# Altium PCB MIN_MOW_Moway_V3 Panel.PcbDoc
Units mm, origin at the board's own origin, x right, y up, seen from the top; angles counter-clockwise.
Board outline 199.54 x 125.53 mm, 4 copper layers (Top Layer, Mid-Layer 1, Mid-Layer 2, Bottom Layer), stack 1 mm thick; 78 components, 0 nets, 326 pads, 0 vias.
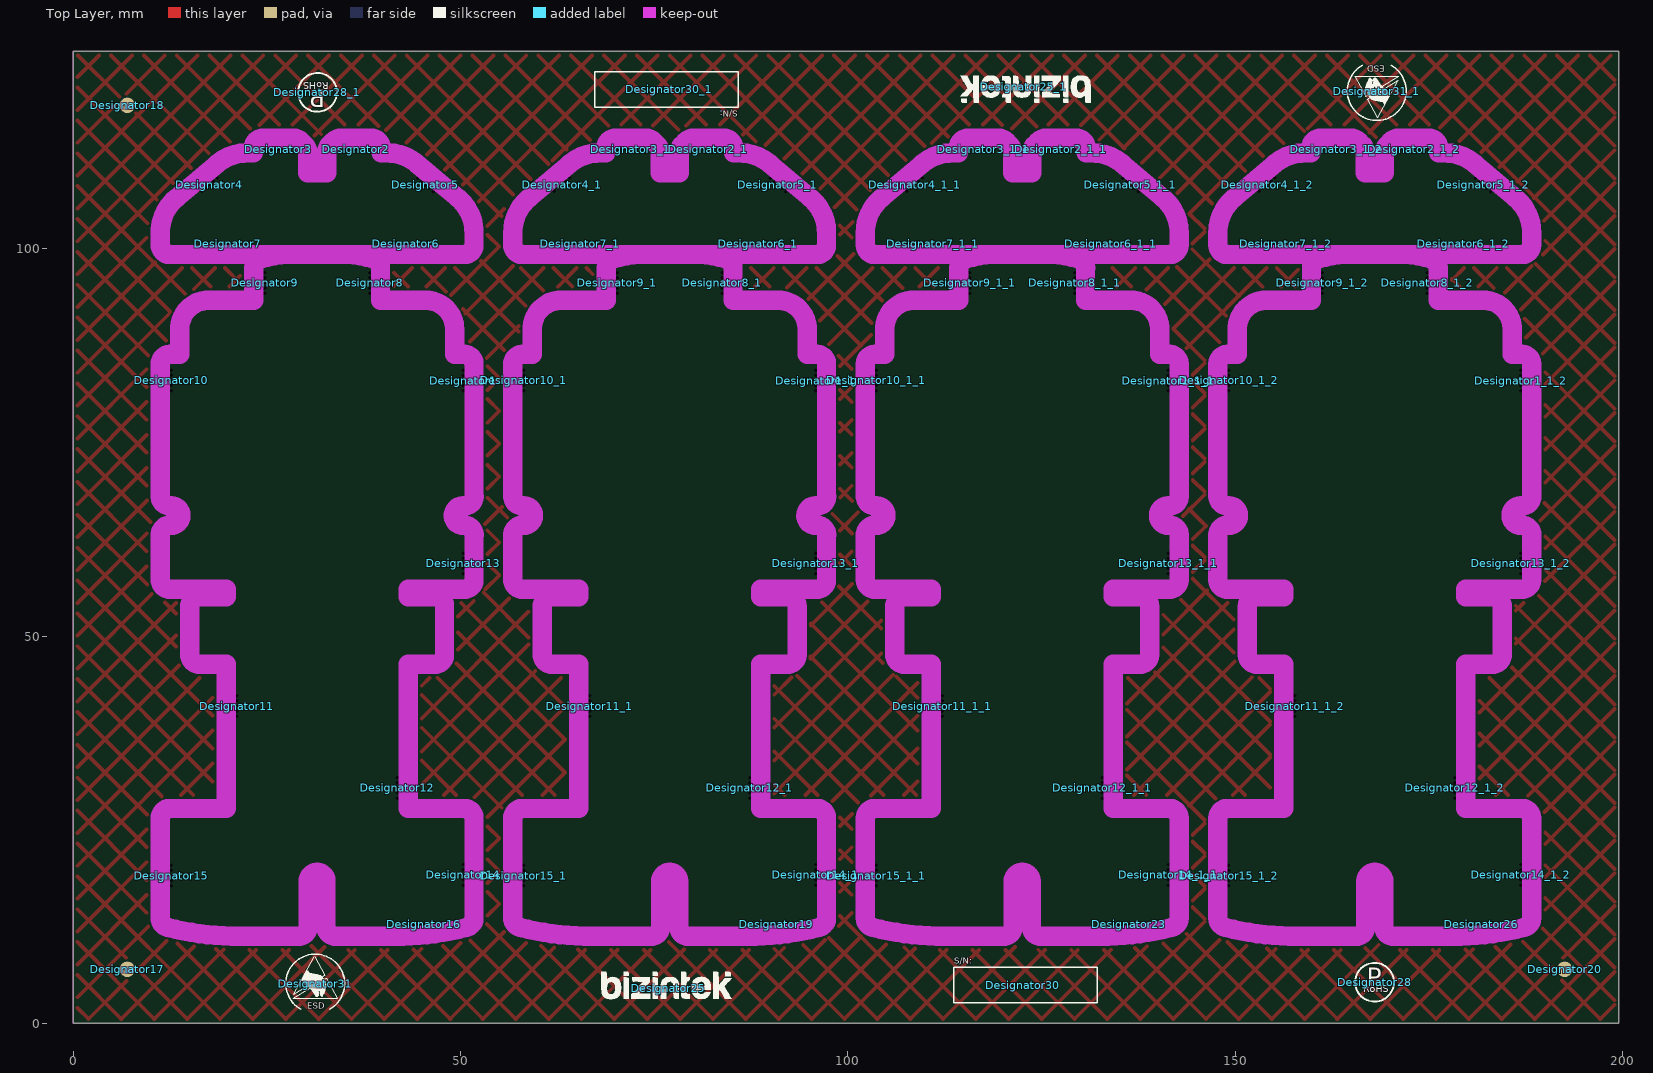
[diagram p0: Top Layer view]
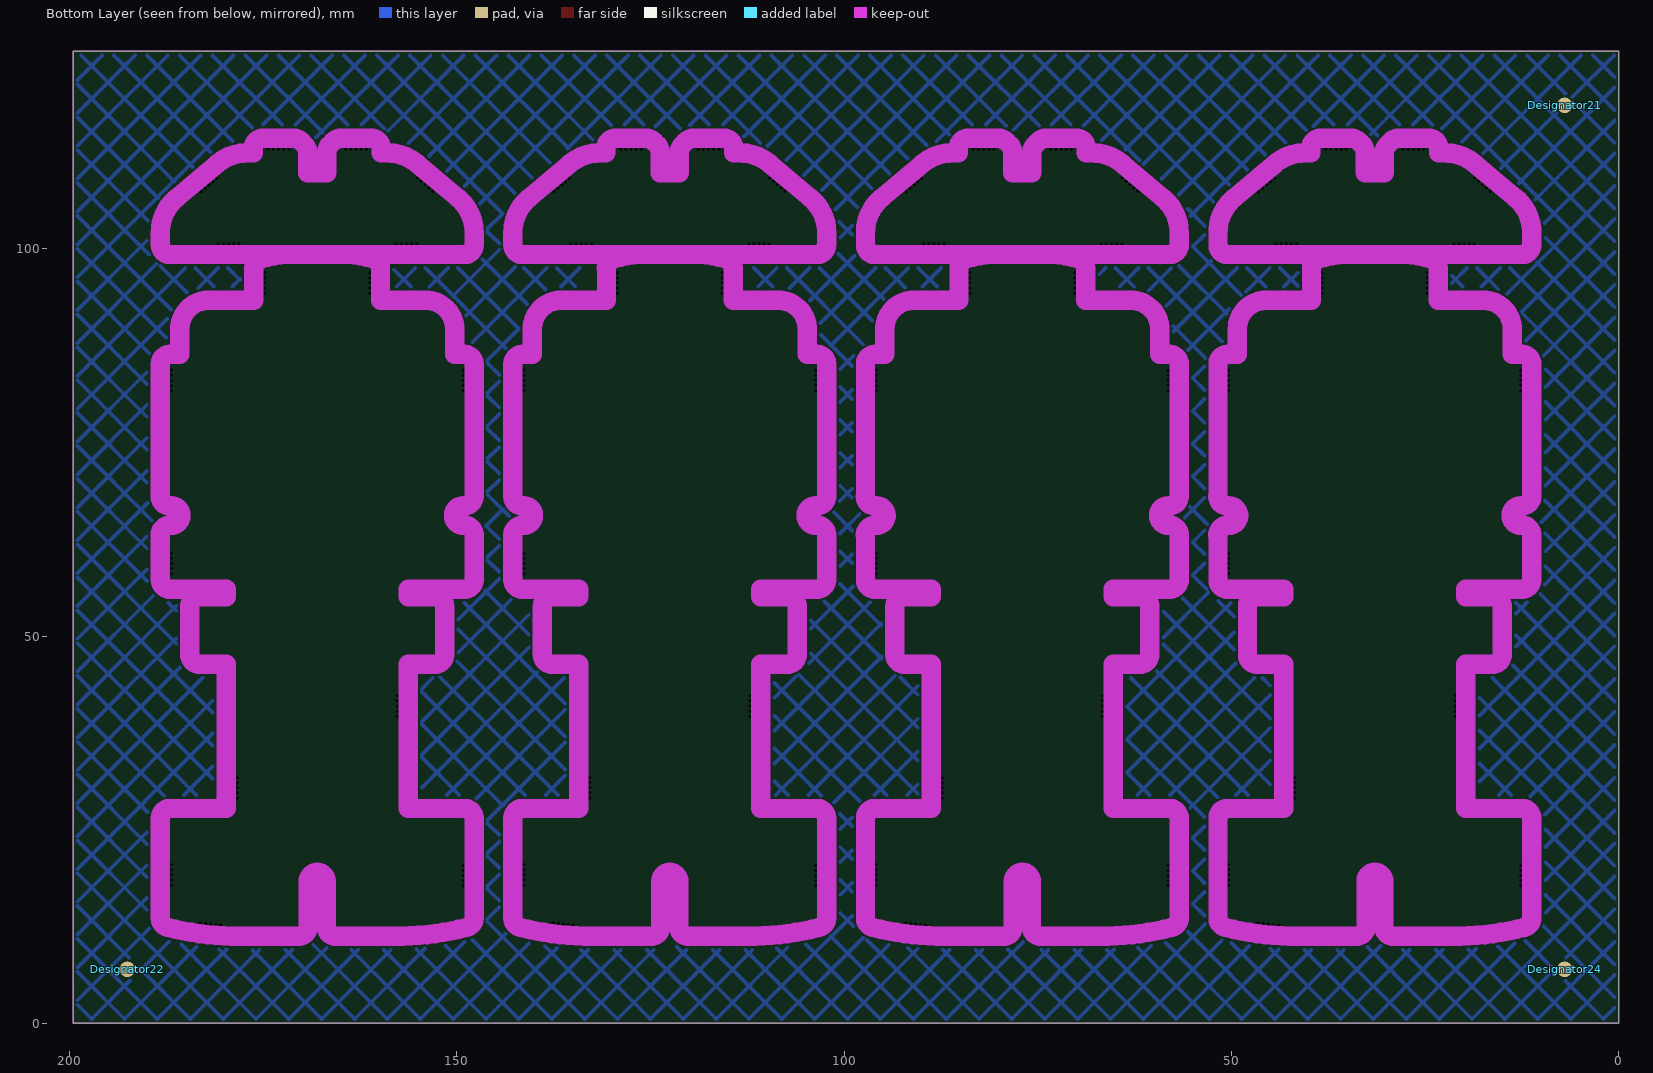
[diagram p1: Bottom Layer view, seen from below]

## Layer stack, top to bottom
Top Layer: signal copper 0.035
Dielectric1: prepreg 0.18, Dk 4.2
Mid-Layer 1: signal copper 0.035
Dielectric 2: core 0.5, Dk 4.2
Mid-Layer 2: signal copper 0.035
Dielectric 2: prepreg 0.18, Dk 4.2
Bottom Layer: signal copper 0.035

## Board outline
0,0 0,125.525 199.543,125.525 199.543,0

## Design rules (kind name [scope] priority, off if disabled: settings)
Clearance [All] p1: gap=0.254 ignorepadtopadclearanceinfootprint=FALSE except(0: Arc-Hole Track-Hole SMDPad-Hole THPad-Hole Via-Hole Fill-Hole Poly-Hole Region-Hole Text-Hole)
HoleToHoleClearance HoleToHoleTabs [InComponent('Designator*') vs InComponent('Designator*')] p1: gap=0 allowstackedmicrovias=TRUE
HoleToHoleClearance [All] p2: gap=0.254 allowstackedmicrovias=TRUE
PolygonConnect [All] p1: connectstyle=Relief reliefconductorwidth=0.254 reliefentries=4 polygonreliefangle="90 Angle" airgapwidth=0.254
RoutingVias [All] p1: holewidth=0.711 width=1.27 viastyle="Through Hole" minholewidth=0.711 minwidth=1.27 maxholewidth=0.711 maxwidth=1.27
SilkToSilkClearance SilkToSilkClearance_1 [InComponent('Designator*') vs InComponent('Designator*')] p1: silktosilkclearance=0
SilkToSilkClearance [All] p2: silktosilkclearance=0.254
SolderMaskExpansion [All] p1: expansion=0.102
Width [All] p1: maxlimit=0.254 minlimit=0.254 preferedwidth=0.254
28 further rules are at their usual default settings.

## Components (designator, comment, footprint, x,y, rotation, side; value= is the part's Value field where it differs from the comment)
Designator1 "Comment" TAB-FRESADO2.5MM-5TALADRO0.45MM 51.75,83 r90 top
Designator1_1 "Comment" TAB-FRESADO2.5MM-5TALADRO0.45MM 97.261,83 r90 top
Designator1_1_1 "Comment" TAB-FRESADO2.5MM-5TALADRO0.45MM 142.772,83 r90 top
Designator1_1_2 "Comment" TAB-FRESADO2.5MM-5TALADRO0.45MM 188.282,83 r90 top
Designator2 "Comment" TAB-FRESADO2.5MM-5TALADRO0.45MM 36.5,114.275 r180 top
Designator2_1 "Comment" TAB-FRESADO2.5MM-5TALADRO0.45MM 82.011,114.275 r180 top
Designator2_1_1 "Comment" TAB-FRESADO2.5MM-5TALADRO0.45MM 127.521,114.275 r180 top
Designator2_1_2 "Comment" TAB-FRESADO2.5MM-5TALADRO0.45MM 173.032,114.275 r180 top
Designator3 "Comment" TAB-FRESADO2.5MM-5TALADRO0.45MM 26.5,114.275 r180 top
Designator3_1 "Comment" TAB-FRESADO2.5MM-5TALADRO0.45MM 72.011,114.275 r180 top
Designator3_1_1 "Comment" TAB-FRESADO2.5MM-5TALADRO0.45MM 117.521,114.275 r180 top
Designator3_1_2 "Comment" TAB-FRESADO2.5MM-5TALADRO0.45MM 163.032,114.275 r180 top
Designator4 "Comment" TAB-FRESADO2.5MM-5TALADRO0.45MM 16.7,109.379 r220 top
Designator4_1 "Comment" TAB-FRESADO2.5MM-5TALADRO0.45MM 62.211,109.379 r220 top
Designator4_1_1 "Comment" TAB-FRESADO2.5MM-5TALADRO0.45MM 107.722,109.379 r220 top
Designator4_1_2 "Comment" TAB-FRESADO2.5MM-5TALADRO0.45MM 153.232,109.379 r220 top
Designator5 "Comment" TAB-FRESADO2.5MM-5TALADRO0.45MM 46.375,109.316 r140 top
Designator5_1 "Comment" TAB-FRESADO2.5MM-5TALADRO0.45MM 91.886,109.316 r140 top
Designator5_1_1 "Comment" TAB-FRESADO2.5MM-5TALADRO0.45MM 137.397,109.316 r140 top
Designator5_1_2 "Comment" TAB-FRESADO2.5MM-5TALADRO0.45MM 182.907,109.316 r140 top
Designator6 "Comment" TAB-FRESADO2.5MM-5TALADRO0.45MM 42.925,99.275 r0 top
Designator6_1 "Comment" TAB-FRESADO2.5MM-5TALADRO0.45MM 88.436,99.275 r0 top
Designator6_1_1 "Comment" TAB-FRESADO2.5MM-5TALADRO0.45MM 133.947,99.275 r0 top
Designator6_1_2 "Comment" TAB-FRESADO2.5MM-5TALADRO0.45MM 179.457,99.275 r0 top
Designator7 "Comment" TAB-FRESADO2.5MM-5TALADRO0.45MM 19.975,99.275 r0 top
Designator7_1 "Comment" TAB-FRESADO2.5MM-5TALADRO0.45MM 65.486,99.275 r0 top
Designator7_1_1 "Comment" TAB-FRESADO2.5MM-5TALADRO0.45MM 110.997,99.275 r0 top
Designator7_1_2 "Comment" TAB-FRESADO2.5MM-5TALADRO0.45MM 156.507,99.275 r0 top
Designator8 "Comment" TAB-FRESADO2.5MM-5TALADRO0.45MM 39.675,95.6 r90 top
Designator8_1 "Comment" TAB-FRESADO2.5MM-5TALADRO0.45MM 85.186,95.6 r90 top
Designator8_1_1 "Comment" TAB-FRESADO2.5MM-5TALADRO0.45MM 130.697,95.6 r90 top
Designator8_1_2 "Comment" TAB-FRESADO2.5MM-5TALADRO0.45MM 176.207,95.6 r90 top
Designator9 "Comment" TAB-FRESADO2.5MM-5TALADRO0.45MM 23.325,95.6 r270 top
Designator9_1 "Comment" TAB-FRESADO2.5MM-5TALADRO0.45MM 68.836,95.6 r270 top
Designator9_1_1 "Comment" TAB-FRESADO2.5MM-5TALADRO0.45MM 114.347,95.6 r270 top
Designator9_1_2 "Comment" TAB-FRESADO2.5MM-5TALADRO0.45MM 159.857,95.6 r270 top
Designator10 "Comment" TAB-FRESADO2.5MM-5TALADRO0.45MM 11.25,83.025 r270 top
Designator10_1 "Comment" TAB-FRESADO2.5MM-5TALADRO0.45MM 56.761,83.025 r270 top
Designator10_1_1 "Comment" TAB-FRESADO2.5MM-5TALADRO0.45MM 102.272,83.025 r270 top
Designator10_1_2 "Comment" TAB-FRESADO2.5MM-5TALADRO0.45MM 147.782,83.025 r270 top
Designator11 "Comment" TAB-FRESADO2.5MM-5TALADRO0.45MM 19.75,40.975 r270 top
Designator11_1 "Comment" TAB-FRESADO2.5MM-5TALADRO0.45MM 65.261,40.975 r270 top
Designator11_1_1 "Comment" TAB-FRESADO2.5MM-5TALADRO0.45MM 110.772,40.975 r270 top
Designator11_1_2 "Comment" TAB-FRESADO2.5MM-5TALADRO0.45MM 156.282,40.975 r270 top
Designator12 "Comment" TAB-FRESADO2.5MM-5TALADRO0.45MM 43.25,30.425 r90 top
Designator12_1 "Comment" TAB-FRESADO2.5MM-5TALADRO0.45MM 88.761,30.425 r90 top
Designator12_1_1 "Comment" TAB-FRESADO2.5MM-5TALADRO0.45MM 134.272,30.425 r90 top
Designator12_1_2 "Comment" TAB-FRESADO2.5MM-5TALADRO0.45MM 179.782,30.425 r90 top
Designator13 "Comment" TAB-FRESADO2.5MM-5TALADRO0.45MM 51.75,59.4 r90 top
Designator13_1 "Comment" TAB-FRESADO2.5MM-5TALADRO0.45MM 97.261,59.4 r90 top
Designator13_1_1 "Comment" TAB-FRESADO2.5MM-5TALADRO0.45MM 142.772,59.4 r90 top
Designator13_1_2 "Comment" TAB-FRESADO2.5MM-5TALADRO0.45MM 188.282,59.4 r90 top
Designator14 "Comment" TAB-FRESADO2.5MM-5TALADRO0.45MM 51.75,19.2 r90 top
Designator14_1 "Comment" TAB-FRESADO2.5MM-5TALADRO0.45MM 97.261,19.2 r90 top
Designator14_1_1 "Comment" TAB-FRESADO2.5MM-5TALADRO0.45MM 142.772,19.2 r90 top
Designator14_1_2 "Comment" TAB-FRESADO2.5MM-5TALADRO0.45MM 188.282,19.2 r90 top
Designator15 "Comment" TAB-FRESADO2.5MM-5TALADRO0.45MM 11.25,19.1 r270 top
Designator15_1 "Comment" TAB-FRESADO2.5MM-5TALADRO0.45MM 56.761,19.1 r270 top
Designator15_1_1 "Comment" TAB-FRESADO2.5MM-5TALADRO0.45MM 102.272,19.1 r270 top
Designator15_1_2 "Comment" TAB-FRESADO2.5MM-5TALADRO0.45MM 147.782,19.1 r270 top
Designator16 "Comment" TAB-FRESADO2.5MM-5TALADRO0.45MM 45.4,11.45 r6 top
Designator17 "Comment" FIDUCIAL_PANEL 7,7 r0 top
Designator18 "Comment" FIDUCIAL_PANEL 7,118.525 r0 top
Designator19 "Comment" TAB-FRESADO2.5MM-5TALADRO0.45MM 90.911,11.45 r6 top
Designator20 "Comment" FIDUCIAL_PANEL 192.543,7 r0 top
Designator21 "Comment" FIDUCIAL_PANEL 7,118.525 r180 bottom
Designator22 "Comment" FIDUCIAL_PANEL 192.543,7 r180 bottom
Designator23 "Comment" TAB-FRESADO2.5MM-5TALADRO0.45MM 136.421,11.45 r6 top
Designator24 "Comment" FIDUCIAL_PANEL 7,7 r180 bottom
Designator25 "Comment" LOGO_BZI 76.825,4.575 r0 top
Designator25_1 "Comment" LOGO_BZI 122.718,120.95 r180 top
Designator26 "Comment" TAB-FRESADO2.5MM-5TALADRO0.45MM 181.932,11.45 r6 top
Designator28 "Comment" LOGO_ROHS 168,5.325 r0 top
Designator28_1 "Comment" LOGO_ROHS 31.543,120.2 r180 top
Designator30 "Comment" LOGO_SN 122.6,4.95 r0 top
Designator30_1 "Comment" LOGO_SN 76.943,120.575 r180 top
Designator31 "Comment" LOGO_ESD_8mm 31.25,5.15 r0 top
Designator31_1 "Comment" LOGO_ESD_8mm 168.293,120.375 r180 top

## Footprints (in the part's own frame and the unit in brackets; to place one, negate y for a bottom-side part, rotate by r counter-clockwise, add the part's x,y. Pads: shape width x height; smd on the part's side, far side on the other; paste and mask are expansions set on the pad)
FIDUCIAL_PANEL [mm]
  round 2 smd paste+0 mask+0.3: 0(0,0)
  Top Solder keep-out region: -2,-2 2,-2 2,2 -2,2
LOGO_BZI [mm]
  silkscreen extent -8.62,-1.42 8.2,2.12
LOGO_ESD_8mm [mm]
  silkscreen extent -3.8,-3.32 3.8,3.8
LOGO_ROHS [mm]
  silkscreen extent -2.5,-2.5 2.5,2.5
LOGO_SN [mm]
  silkscreen extent -8.92,-2.3 9.58,2.3
TAB-FRESADO2.5MM-5TALADRO0.45MM [mm]
  round 0 hole 0.45 unplated paste-1: 0(-1.325,1.4) 0(-0.663,1.4) 0(0,1.4) 0(0.663,1.4) 0(1.325,1.4)

## Nets (pads, with @x,y where several pads share a name; then routed paths per layer and width w, separated by ;. In a path a pad name is that pad's centre, name@x,y a point inside that pad or via, vN(x,y) a via of type N, cw(c..) or ccw(c..) an arc to the next point about the centre after c; other vN are vias at no path point)
pads on no net: Designator1.0 Designator1_1.0 Designator1_1_1.0 Designator1_1_2.0 Designator2.0 Designator2_1.0 Designator2_1_1.0 Designator2_1_2.0 Designator3.0 Designator3_1.0 Designator3_1_1.0 Designator3_1_2.0 Designator4.0 Designator4_1.0 Designator4_1_1.0 Designator4_1_2.0 Designator5.0 Designator5_1.0 Designator5_1_1.0 Designator5_1_2.0 Designator6.0 Designator6_1.0 Designator6_1_1.0 Designator6_1_2.0 Designator7.0 Designator7_1.0 Designator7_1_1.0 Designator7_1_2.0 Designator8.0 Designator8_1.0 Designator8_1_1.0 Designator8_1_2.0 Designator9.0 Designator9_1.0 Designator9_1_1.0 Designator9_1_2.0 Designator10.0 Designator10_1.0 Designator10_1_1.0 Designator10_1_2.0 Designator11.0 Designator11_1.0 Designator11_1_1.0 Designator11_1_2.0 Designator12.0 Designator12_1.0 Designator12_1_1.0 Designator12_1_2.0 Designator13.0 Designator13_1.0 Designator13_1_1.0 Designator13_1_2.0 Designator14.0 Designator14_1.0 Designator14_1_1.0 Designator14_1_2.0 Designator15.0 Designator15_1.0 Designator15_1_1.0 Designator15_1_2.0 Designator16.0 Designator17.0 Designator18.0 Designator19.0 Designator20.0 Designator21.0 Designator22.0 Designator23.0 Designator24.0 Designator26.0

## Polygon pours and split planes (outlines as drawn)
no net on Top Layer "TOP_POLY" (hatched 45Degree grid 3 track 0.5, remove dead copper, pour order 0): 0,125.525 0,0 199.543,0 199.543,125.525
no net on Bottom Layer "BOT_POLY" (hatched 45Degree grid 3 track 0.5, remove dead copper, pour order 1): 0,0 0,125.525 199.543,125.525 199.543,0

## Keep-outs
Keep-Out Layer:
  lines w0.1: 0,0 0,125.525 199.543,125.525 199.543,0 0,0
  lines w2.5: 11.25,13.611 ccw(c12.5,13.611) 12.196,12.399 ; 11.25,13.611 ccw(c12.5,13.611) 12.196,12.399 ; 11.25,13.611 11.25,26.5 ; 11.25,26.5 cw(c12.5,26.5) 12.5,27.75 ; 11.25,26.5 cw(c12.5,26.5) 12.5,27.75 ; 11.25,57.3 ccw(c12.5,57.3) 12.5,56.05 ; 11.25,57.3 ccw(c12.5,57.3) 12.5,56.05 ; 11.25,57.3 11.25,63.06 ; 11.25,63.06 cw(c12.5,63.071) 11.253,63.153 ; 11.25,63.06 cw(c12.5,63.071) 11.253,63.153 ; 11.25,68.071 ccw(c12.5,68.06) 11.253,67.978 ; 11.25,68.071 ccw(c12.5,68.06) 11.253,67.978 ; 11.25,68.071 11.25,85.125 ; 11.25,85.125 cw(c12.5,85.125) 12.5,86.375 ; 11.25,85.125 cw(c12.5,85.125) 12.5,86.375 ; 11.25,100.525 ccw(c12.5,100.525) 12.5,99.275 ; 11.25,100.525 ccw(c12.5,100.525) 12.5,99.275 ; 11.25,100.525 11.25,102.125 cw(c17,102.125) 13.304,106.53 18.664,111.028 ; 11.253,63.154 cw(c12.5,63.071) 11.253,63.154 ; 11.253,63.154 ccw(c12.5,63.071) 11.253,63.153 ; 11.253,63.154 cw(c12.5,63.072) 11.253,63.154 ; 11.253,63.154 ccw(c12.5,63.072) 11.253,63.153 ; 11.253,63.153 11.253,63.154 ; 11.253,63.154 cw(c12.5,63.072) 12.614,64.317 ; 11.253,63.154 cw(c12.5,63.072) 12.614,64.317 ; 11.253,67.978 ccw(c12.5,68.06) 11.253,67.978 ; 11.253,67.978 ccw(c12.5,68.06) 11.253,67.977 ; 11.253,67.978 ccw(c12.5,68.059) 11.253,67.978 ; 11.253,67.978 ccw(c12.5,68.059) 11.253,67.977 ; 11.253,67.977 ccw(c12.5,68.059) 12.5,66.809 ; 11.253,67.977 ccw(c12.5,68.059) 12.5,66.809 ; 11.253,67.978 11.253,67.977 ; 12.196,12.399 ccw(c21.5,49.5) 21.5,11.25 29.1,11.25 ; 12.5,27.75 19.75,27.75 19.75,46.37 16.3,46.37 ; 12.5,56.05 19.75,56.05 19.75,55.07 16.3,55.07 ; 12.5,66.809 ccw(c12.5,68.059) 12.614,66.815 ; 12.5,66.809 ccw(c12.5,68.059) 12.614,66.815 ; 12.5,86.375 13.75,86.375 13.75,89.625 cw(c17.5,89.625) 13.871,90.57 cw(c17.5,89.625) 17.5,93.375 23.325,93.375 23.325,97.383 ; 12.5,99.275 50.5,99.275 ; 12.614,64.317 ccw(c12.667,65.566) 12.667,64.316 ccw(c12.667,65.566) 12.614,66.815 ; 15.05,47.62 ccw(c16.3,47.62) 16.3,46.37 ; 15.05,47.62 ccw(c16.3,47.62) 16.3,46.37 ; 15.05,47.62 15.05,53.82 ; 15.05,53.82 cw(c16.3,53.82) 16.3,55.07 ; 15.05,53.82 cw(c16.3,53.82) 16.3,55.07 ; 18.664,111.028 cw(c19.47,110.072) 18.667,111.03 ; 18.664,111.028 cw(c19.47,110.072) 18.667,111.03 ; 18.664,111.028 18.667,111.03 ; 18.667,111.03 cw(c22.363,106.625) 22.363,112.375 ; 22.363,112.375 cw(c22.363,111.125) 22.365,112.375 ; 22.363,112.375 cw(c22.363,111.125) 22.365,112.375 ; 22.363,112.375 22.365,112.375 ; 22.365,112.375 23.25,112.375 23.25,113.025 ; 23.25,113.025 cw(c24.5,113.025) 24.5,114.275 ; 23.25,113.025 cw(c24.5,113.025) 24.5,114.275 ; 23.325,97.383 cw(c24.57,97.495) 24.247,98.702 ; 23.325,97.383 cw(c24.57,97.495) 24.247,98.702 ; 24.247,98.702 cw(c31.5,71.568) 26.79,99.257 cw(c27,98.025) 27,99.275 36,99.275 cw(c36,98.025) 36.21,99.257 cw(c31.5,71.568) 38.753,98.702 ; 24.5,114.275 28.5,114.275 ; 28.5,114.275 cw(c28.5,113.025) 29.384,113.909 ; 28.5,114.275 cw(c28.5,113.025) 29.384,113.909 ; 29.1,11.25 ccw(c29.1,12.5) 30.35,12.5 ; 29.1,11.25 ccw(c29.1,12.5) 30.35,12.5 ; 29.384,113.909 29.884,113.409 ; 29.884,113.409 cw(c29,112.525) 30.25,112.525 ; 29.884,113.409 cw(c29,112.525) 30.25,112.525 ; 30.25,112.525 30.25,109.795 32.75,109.795 32.75,112.525 ; 30.35,12.5 30.35,18.351 ; 30.35,18.351 ccw(c29.1,18.351) 30.35,18.359 ; 30.35,18.351 ccw(c29.1,18.351) 30.35,18.357 cw(c31.5,18.363) 30.35,18.359 ; 30.35,18.359 cw(c31.5,18.363) 32.65,18.363 32.65,12.5 ; 32.65,12.5 ccw(c33.9,12.5) 33.9,11.25 ; 32.65,12.5 ccw(c33.9,12.5) 33.9,11.25 ; 32.75,112.525 cw(c34,112.525) 33.116,113.409 33.117,113.41 ; 32.75,112.525 cw(c34,112.525) 33.117,113.41 ; 33.117,113.41 33.615,113.908 ; 33.615,113.908 cw(c34.5,113.025) 34.5,114.275 ; 33.615,113.908 33.616,113.909 cw(c34.5,113.025) 34.5,114.275 ; 33.9,11.25 41.5,11.25 ccw(c41.5,49.5) 50.804,12.399 ; 34.5,114.275 38.5,114.275 ; 38.5,114.275 cw(c38.5,113.025) 39.75,113.025 ; 38.5,114.275 cw(c38.5,113.025) 39.75,113.025 ; 38.753,98.702 cw(c38.43,97.495) 39.675,97.383 ; 38.753,98.702 cw(c38.43,97.495) 39.675,97.383 ; 39.675,97.383 39.675,93.375 45.5,93.375 cw(c45.5,89.625) 49.06,90.804 cw(c45.5,89.625) 49.25,89.625 ; 39.75,113.025 39.75,112.375 40.637,112.375 cw(c40.637,106.625) 44.333,111.03 49.696,106.53 cw(c46,102.125) 51.75,102.125 51.75,100.525 ; 46.7,46.37 ccw(c46.7,47.62) 47.95,47.62 ; 46.7,46.37 ccw(c46.7,47.62) 47.95,47.62 ; 46.7,46.37 43.25,46.37 43.25,27.75 50.5,27.75 ; 46.7,55.07 cw(c46.7,53.82) 47.95,53.82 ; 46.7,55.07 cw(c46.7,53.82) 47.95,53.82 ; 46.7,55.07 43.25,55.07 43.25,56.05 50.5,56.05 ; 47.95,47.62 47.95,53.82 ; 49.25,89.622 ccw(c48,89.625) 49.25,89.625 ; 49.25,89.622 ccw(c48,89.625) 49.25,89.625 ; 49.25,89.622 49.25,89.625 ; 49.25,89.622 49.25,86.375 50.5,86.375 ; 50.386,64.317 cw(c50.333,65.566) 50.333,64.316 cw(c50.333,65.566) 50.386,66.815 ; 50.386,64.317 cw(c50.5,63.072) 50.5,64.322 ; 50.386,64.317 cw(c50.5,63.072) 50.5,64.322 ; 50.386,66.815 ccw(c50.5,68.059) 50.5,66.809 ; 50.386,66.815 ccw(c50.5,68.059) 50.5,66.809 ; 50.5,27.75 cw(c50.5,26.5) 51.75,26.5 ; 50.5,27.75 cw(c50.5,26.5) 51.75,26.5 ; 50.5,56.05 ccw(c50.5,57.3) 51.75,57.3 ; 50.5,56.05 ccw(c50.5,57.3) 51.75,57.3 ; 50.5,64.322 cw(c50.5,63.072) 50.505,64.322 cw(c50.511,63.072) 50.511,64.322 ; 50.5,64.322 50.511,64.322 ; 50.5,66.809 ccw(c50.5,68.059) 50.505,66.809 ccw(c50.511,68.059) 50.511,66.809 ; 50.5,66.809 50.511,66.809 ; 50.5,86.375 cw(c50.5,85.125) 51.75,85.125 ; 50.5,86.375 cw(c50.5,85.125) 51.75,85.125 ; 50.5,99.275 ccw(c50.5,100.525) 51.75,100.525 ; 50.5,99.275 ccw(c50.5,100.525) 51.75,100.525 ; 50.511,64.322 cw(c50.511,63.072) 51.75,62.909 ; 50.511,64.322 cw(c50.511,63.072) 51.75,62.909 ; 50.511,66.809 ccw(c50.511,68.059) 51.75,68.222 ; 50.511,66.809 ccw(c50.511,68.059) 51.75,68.222 ; 50.804,12.399 ccw(c50.5,13.611) 51.75,13.611 ; 50.804,12.399 ccw(c50.5,13.611) 51.75,13.611 ; 51.75,13.611 51.75,26.5 ; 51.75,57.3 51.75,62.909 ; 51.75,68.222 51.75,85.125 ; 56.761,13.611 ccw(c58.011,13.611) 57.707,12.399 ; 56.761,13.611 ccw(c58.011,13.611) 57.707,12.399 ; 56.761,13.611 56.761,26.5 ; 56.761,26.5 cw(c58.011,26.5) 58.011,27.75 ; 56.761,26.5 cw(c58.011,26.5) 58.011,27.75 ; 56.761,57.3 ccw(c58.011,57.3) 58.011,56.05 ; 56.761,57.3 ccw(c58.011,57.3) 58.011,56.05 ; 56.761,57.3 56.761,63.06 ; 56.761,63.06 cw(c58.011,63.071) 56.763,63.153 ; 56.761,63.06 cw(c58.011,63.071) 56.763,63.153 ; 56.761,68.071 ccw(c58.011,68.06) 56.763,67.978 ; 56.761,68.071 ccw(c58.011,68.06) 56.763,67.978 ; 56.761,68.071 56.761,85.125 ; 56.761,85.125 cw(c58.011,85.125) 58.011,86.375 ; 56.761,85.125 cw(c58.011,85.125) 58.011,86.375 ; 56.761,100.525 ccw(c58.011,100.525) 58.011,99.275 ; 56.761,100.525 ccw(c58.011,100.525) 58.011,99.275 ; 56.761,100.525 56.761,102.125 cw(c62.511,102.125) 58.815,106.53 64.175,111.028 ; 56.763,63.154 ccw(c58.011,63.072) 56.763,63.153 ; 56.763,63.154 cw(c58.011,63.072) 56.763,63.154 ; 56.763,63.154 ccw(c58.011,63.071) 56.763,63.153 ; 56.763,63.154 cw(c58.011,63.071) 56.763,63.154 ; 56.763,63.153 56.763,63.154 ; 56.763,63.154 cw(c58.011,63.072) 58.125,64.317 ; 56.763,63.154 cw(c58.011,63.072) 58.125,64.317 ; 56.763,67.977 ccw(c58.011,68.059) 58.011,66.809 ; 56.763,67.977 ccw(c58.011,68.059) 58.011,66.809 ; 56.763,67.978 ccw(c58.011,68.059) 56.763,67.977 ; 56.763,67.978 ccw(c58.011,68.059) 56.763,67.978 ; 56.763,67.978 ccw(c58.011,68.06) 56.763,67.977 ; 56.763,67.978 ccw(c58.011,68.06) 56.763,67.978 ; 56.763,67.978 56.763,67.977 ; 57.707,12.399 ccw(c67.011,49.5) 67.011,11.25 74.611,11.25 ; 58.011,27.75 65.261,27.75 65.261,46.37 61.811,46.37 ; 58.011,56.05 65.261,56.05 65.261,55.07 61.811,55.07 ; 58.011,66.809 ccw(c58.011,68.059) 58.125,66.815 ; 58.011,66.809 ccw(c58.011,68.059) 58.125,66.815 ; 58.011,86.375 59.261,86.375 59.261,89.625 cw(c63.011,89.625) 59.382,90.57 cw(c63.011,89.625) 63.011,93.375 68.836,93.375 68.836,97.383 ; 58.011,99.275 96.011,99.275 ; 58.125,64.317 ccw(c58.178,65.566) 58.178,64.316 ccw(c58.178,65.566) 58.125,66.815 ; 60.561,47.62 ccw(c61.811,47.62) 61.811,46.37 ; 60.561,47.62 ccw(c61.811,47.62) 61.811,46.37 ; 60.561,47.62 60.561,53.82 ; 60.561,53.82 cw(c61.811,53.82) 61.811,55.07 ; 60.561,53.82 cw(c61.811,53.82) 61.811,55.07 ; 64.175,111.028 cw(c64.981,110.072) 64.178,111.03 ; 64.175,111.028 cw(c64.981,110.072) 64.178,111.03 ; 64.175,111.028 64.178,111.03 ; 64.178,111.03 cw(c67.874,106.625) 67.874,112.375 ; 67.874,112.375 cw(c67.874,111.125) 67.876,112.375 ; 67.874,112.375 cw(c67.874,111.125) 67.876,112.375 ; 67.874,112.375 67.876,112.375 ; 67.876,112.375 68.761,112.375 68.761,113.025 ; 68.761,113.025 cw(c70.011,113.025) 70.011,114.275 ; 68.761,113.025 cw(c70.011,113.025) 70.011,114.275 ; 68.836,97.383 cw(c70.081,97.495) 69.758,98.702 ; 68.836,97.383 cw(c70.081,97.495) 69.758,98.702 ; 69.758,98.702 cw(c77.011,71.568) 72.301,99.257 cw(c72.511,98.025) 72.511,99.275 81.511,99.275 cw(c81.511,98.025) 81.72,99.257 cw(c77.011,71.568) 84.264,98.702 ; 70.011,114.275 74.011,114.275 ; 74.011,114.275 cw(c74.011,113.025) 74.895,113.909 ; 74.011,114.275 cw(c74.011,113.025) 74.895,113.909 ; 74.611,11.25 ccw(c74.611,12.5) 75.861,12.5 ; 74.611,11.25 ccw(c74.611,12.5) 75.861,12.5 ; 74.895,113.909 75.395,113.409 ; 75.395,113.409 cw(c74.511,112.525) 75.761,112.525 ; 75.395,113.409 cw(c74.511,112.525) 75.761,112.525 ; 75.761,112.525 75.761,109.795 78.261,109.795 78.261,112.525 ; 75.861,12.5 75.861,18.351 ; 75.861,18.351 ccw(c74.611,18.351) 75.861,18.357 cw(c77.011,18.363) 75.861,18.359 ; 75.861,18.351 ccw(c74.611,18.351) 75.861,18.359 ; 75.861,18.359 cw(c77.011,18.363) 78.161,18.363 78.161,12.5 ; 78.161,12.5 ccw(c79.411,12.5) 79.411,11.25 ; 78.161,12.5 ccw(c79.411,12.5) 79.411,11.25 ; 78.261,112.525 cw(c79.511,112.525) 78.628,113.41 ; 78.261,112.525 cw(c79.511,112.525) 78.627,113.409 78.628,113.41 ; 78.628,113.41 79.126,113.908 ; 79.126,113.908 cw(c80.011,113.025) 80.011,114.275 ; 79.126,113.908 79.127,113.909 cw(c80.011,113.025) 80.011,114.275 ; 79.411,11.25 87.011,11.25 ccw(c87.011,49.5) 96.315,12.399 ; 80.011,114.275 84.011,114.275 ; 84.011,114.275 cw(c84.011,113.025) 85.261,113.025 ; 84.011,114.275 cw(c84.011,113.025) 85.261,113.025 ; 84.264,98.702 cw(c83.941,97.495) 85.186,97.383 ; 84.264,98.702 cw(c83.941,97.495) 85.186,97.383 ; 85.186,97.383 85.186,93.375 91.011,93.375 cw(c91.011,89.625) 94.571,90.804 cw(c91.011,89.625) 94.761,89.625 ; 85.261,113.025 85.261,112.375 86.148,112.375 cw(c86.148,106.625) 89.844,111.03 95.207,106.53 cw(c91.511,102.125) 97.261,102.125 97.261,100.525 ; 92.211,46.37 ccw(c92.211,47.62) 93.461,47.62 ; 92.211,46.37 ccw(c92.211,47.62) 93.461,47.62 ; 92.211,46.37 88.761,46.37 88.761,27.75 96.011,27.75 ; 92.211,55.07 cw(c92.211,53.82) 93.461,53.82 ; 92.211,55.07 cw(c92.211,53.82) 93.461,53.82 ; 92.211,55.07 88.761,55.07 88.761,56.05 96.011,56.05 ; 93.461,47.62 93.461,53.82 ; 94.761,89.622 ccw(c93.511,89.625) 94.761,89.625 ; 94.761,89.622 ccw(c93.511,89.625) 94.761,89.625 ; 94.761,89.622 94.761,86.375 96.011,86.375 ; 94.761,89.622 94.761,89.625 ; 95.897,64.317 cw(c96.011,63.072) 96.011,64.322 ; 95.897,64.317 cw(c96.011,63.072) 96.011,64.322 ; 95.897,64.317 cw(c95.844,65.566) 95.844,64.316 cw(c95.844,65.566) 95.897,66.815 ; 95.897,66.815 ccw(c96.011,68.059) 96.011,66.809 ; 95.897,66.815 ccw(c96.011,68.059) 96.011,66.809 ; 96.011,99.275 ccw(c96.011,100.525) 97.261,100.525 ; 96.011,99.275 ccw(c96.011,100.525) 97.261,100.525 ; 96.011,27.75 cw(c96.011,26.5) 97.261,26.5 ; 96.011,27.75 cw(c96.011,26.5) 97.261,26.5 ; 96.011,56.05 ccw(c96.011,57.3) 97.261,57.3 ; 96.011,56.05 ccw(c96.011,57.3) 97.261,57.3 ; 96.011,64.322 cw(c96.011,63.072) 96.016,64.322 cw(c96.021,63.072) 96.021,64.322 ; 96.011,64.322 96.021,64.322 ; 96.011,66.809 ccw(c96.011,68.059) 96.016,66.809 ccw(c96.021,68.059) 96.021,66.809 ; 96.011,66.809 96.021,66.809 ; 96.011,86.375 cw(c96.011,85.125) 97.261,85.125 ; 96.011,86.375 cw(c96.011,85.125) 97.261,85.125 ; 96.021,64.322 cw(c96.021,63.072) 97.261,62.909 ; 96.021,64.322 cw(c96.021,63.072) 97.261,62.909 ; 96.021,66.809 ccw(c96.021,68.059) 97.261,68.222 ; 96.021,66.809 ccw(c96.021,68.059) 97.261,68.222 ; 96.315,12.399 ccw(c96.011,13.611) 97.261,13.611 ; 96.315,12.399 ccw(c96.011,13.611) 97.261,13.611 ; 97.261,13.611 97.261,26.5 ; 97.261,57.3 97.261,62.909 ; 97.261,68.222 97.261,85.125 ; 102.272,13.611 ccw(c103.522,13.611) 103.217,12.399 ; 102.272,13.611 ccw(c103.522,13.611) 103.217,12.399 ; 102.272,13.611 102.272,26.5 ; 102.272,26.5 cw(c103.522,26.5) 103.522,27.75 ; 102.272,26.5 cw(c103.522,26.5) 103.522,27.75 ; 102.272,57.3 ccw(c103.522,57.3) 103.522,56.05 ; 102.272,57.3 ccw(c103.522,57.3) 103.522,56.05 ; 102.272,57.3 102.272,63.06 ; 102.272,63.06 cw(c103.521,63.071) 102.274,63.153 ; 102.272,63.06 cw(c103.521,63.071) 102.274,63.153 ; 102.272,68.071 ccw(c103.521,68.06) 102.274,67.978 ; 102.272,68.071 ccw(c103.521,68.06) 102.274,67.978 ; 102.272,68.071 102.272,85.125 ; 102.272,85.125 cw(c103.522,85.125) 103.522,86.375 ; 102.272,85.125 cw(c103.522,85.125) 103.522,86.375 ; 102.271,100.525 ccw(c103.521,100.525) 103.521,99.275 ; 102.271,100.525 ccw(c103.521,100.525) 103.521,99.275 ; 102.271,100.525 102.271,102.125 cw(c108.021,102.125) 104.325,106.53 109.686,111.028 ; 102.274,63.154 cw(c103.521,63.071) 102.274,63.154 ; 102.274,63.154 ccw(c103.521,63.071) 102.274,63.153 ; 102.274,63.154 cw(c103.522,63.072) 102.274,63.154 ; 102.274,63.154 ccw(c103.522,63.072) 102.274,63.153 ; 102.274,63.153 102.274,63.154 ; 102.274,63.154 cw(c103.522,63.072) 103.635,64.317 ; 102.274,63.154 cw(c103.522,63.072) 103.635,64.317 ; 102.274,67.978 ccw(c103.521,68.06) 102.274,67.978 ; 102.274,67.978 ccw(c103.521,68.06) 102.274,67.977 ; 102.274,67.978 ccw(c103.522,68.059) 102.274,67.978 ; 102.274,67.978 ccw(c103.522,68.059) 102.274,67.977 ; 102.274,67.977 ccw(c103.522,68.059) 103.522,66.809 ; 102.274,67.977 ccw(c103.522,68.059) 103.522,66.809 ; 102.274,67.978 102.274,67.977 ; 103.217,12.399 ccw(c112.522,49.5) 112.522,11.25 120.122,11.25 ; 103.521,99.275 141.521,99.275 ; 103.522,27.75 110.772,27.75 110.772,46.37 107.322,46.37 ; 103.522,56.05 110.772,56.05 110.772,55.07 107.322,55.07 ; 103.522,66.809 ccw(c103.522,68.059) 103.635,66.815 ; 103.522,66.809 ccw(c103.522,68.059) 103.635,66.815 ; 103.522,86.375 104.772,86.375 104.772,89.625 cw(c108.522,89.625) 104.893,90.57 cw(c108.522,89.625) 108.522,93.375 114.347,93.375 114.347,97.383 ; 103.635,64.317 ccw(c103.689,65.566) 103.689,64.316 ccw(c103.689,65.566) 103.635,66.815 ; 106.072,47.62 ccw(c107.322,47.62) 107.322,46.37 ; 106.072,47.62 ccw(c107.322,47.62) 107.322,46.37 ; 106.072,47.62 106.072,53.82 ; 106.072,53.82 cw(c107.322,53.82) 107.322,55.07 ; 106.072,53.82 cw(c107.322,53.82) 107.322,55.07 ; 109.686,111.028 cw(c110.492,110.072) 109.688,111.03 ; 109.686,111.028 cw(c110.492,110.072) 109.688,111.03 ; 109.686,111.028 109.688,111.03 ; 109.688,111.03 cw(c113.384,106.625) 113.384,112.375 ; 113.384,112.375 cw(c113.384,111.125) 113.387,112.375 ; 113.384,112.375 cw(c113.384,111.125) 113.387,112.375 ; 113.384,112.375 113.387,112.375 ; 113.387,112.375 114.271,112.375 114.271,113.025 ; 114.271,113.025 cw(c115.521,113.025) 115.521,114.275 ; 114.271,113.025 cw(c115.521,113.025) 115.521,114.275 ; 114.347,97.383 cw(c115.592,97.495) 115.269,98.702 ; 114.347,97.383 cw(c115.592,97.495) 115.269,98.702 ; 115.269,98.702 cw(c122.522,71.568) 117.812,99.257 cw(c118.022,98.025) 118.022,99.275 127.022,99.275 cw(c127.022,98.025) 127.231,99.257 cw(c122.522,71.568) 129.774,98.702 ; 115.521,114.275 119.521,114.275 ; 119.521,114.275 cw(c119.521,113.025) 120.405,113.909 ; 119.521,114.275 cw(c119.521,113.025) 120.405,113.909 ; 120.122,11.25 ccw(c120.122,12.5) 121.372,12.5 ; 120.122,11.25 ccw(c120.122,12.5) 121.372,12.5 ; 120.405,113.909 120.905,113.409 ; 120.905,113.409 cw(c120.021,112.525) 121.271,112.525 ; 120.905,113.409 cw(c120.021,112.525) 121.271,112.525 ; 121.271,112.525 121.271,109.795 123.771,109.795 123.771,112.525 ; 121.372,12.5 121.372,18.351 ; 121.372,18.351 ccw(c120.122,18.351) 121.372,18.359 ; 121.372,18.351 ccw(c120.122,18.351) 121.372,18.357 cw(c122.522,18.363) 121.372,18.359 ; 121.372,18.359 cw(c122.522,18.363) 123.672,18.363 123.672,12.5 ; 123.672,12.5 ccw(c124.922,12.5) 124.922,11.25 ; 123.672,12.5 ccw(c124.922,12.5) 124.922,11.25 ; 123.771,112.525 cw(c125.021,112.525) 124.137,113.409 124.138,113.41 ; 123.771,112.525 cw(c125.021,112.525) 124.138,113.41 ; 124.138,113.41 124.637,113.908 ; 124.637,113.908 cw(c125.521,113.025) 125.521,114.275 ; 124.637,113.908 124.637,113.909 cw(c125.521,113.025) 125.521,114.275 ; 124.922,11.25 132.522,11.25 ccw(c132.522,49.5) 141.826,12.399 ; 125.521,114.275 129.521,114.275 ; 129.521,114.275 cw(c129.521,113.025) 130.771,113.025 ; 129.521,114.275 cw(c129.521,113.025) 130.771,113.025 ; 129.774,98.702 cw(c129.452,97.495) 130.697,97.383 ; 129.774,98.702 cw(c129.452,97.495) 130.697,97.383 ; 130.697,97.383 130.697,93.375 136.522,93.375 cw(c136.522,89.625) 140.081,90.804 cw(c136.522,89.625) 140.272,89.625 ; 130.771,113.025 130.771,112.375 131.658,112.375 cw(c131.658,106.625) 135.355,111.03 140.717,106.53 cw(c137.021,102.125) 142.771,102.125 142.771,100.525 ; 137.722,46.37 ccw(c137.722,47.62) 138.972,47.62 ; 137.722,46.37 ccw(c137.722,47.62) 138.972,47.62 ; 137.722,46.37 134.272,46.37 134.272,27.75 141.522,27.75 ; 137.722,55.07 cw(c137.722,53.82) 138.972,53.82 ; 137.722,55.07 cw(c137.722,53.82) 138.972,53.82 ; 137.722,55.07 134.272,55.07 134.272,56.05 141.522,56.05 ; 138.972,47.62 138.972,53.82 ; 140.272,89.622 ccw(c139.022,89.625) 140.272,89.625 ; 140.272,89.622 ccw(c139.022,89.625) 140.272,89.625 ; 140.272,89.622 140.272,89.625 ; 140.272,89.622 140.272,86.375 141.522,86.375 ; 141.408,64.317 cw(c141.354,65.566) 141.354,64.316 cw(c141.354,65.566) 141.408,66.815 ; 141.408,64.317 cw(c141.522,63.072) 141.522,64.322 ; 141.408,64.317 cw(c141.522,63.072) 141.522,64.322 ; 141.408,66.815 ccw(c141.522,68.059) 141.522,66.809 ; 141.408,66.815 ccw(c141.522,68.059) 141.522,66.809 ; 141.522,27.75 cw(c141.522,26.5) 142.772,26.5 ; 141.522,27.75 cw(c141.522,26.5) 142.772,26.5 ; 141.522,56.05 ccw(c141.522,57.3) 142.772,57.3 ; 141.522,56.05 ccw(c141.522,57.3) 142.772,57.3 ; 141.522,64.322 cw(c141.522,63.072) 141.527,64.322 cw(c141.532,63.072) 141.532,64.322 ; 141.522,64.322 141.532,64.322 ; 141.522,66.809 ccw(c141.522,68.059) 141.527,66.809 ccw(c141.532,68.059) 141.532,66.809 ; 141.522,66.809 141.532,66.809 ; 141.522,86.375 cw(c141.522,85.125) 142.772,85.125 ; 141.522,86.375 cw(c141.522,85.125) 142.772,85.125 ; 141.521,99.275 ccw(c141.521,100.525) 142.771,100.525 ; 141.521,99.275 ccw(c141.521,100.525) 142.771,100.525 ; 141.532,64.322 cw(c141.532,63.072) 142.772,62.909 ; 141.532,64.322 cw(c141.532,63.072) 142.772,62.909 ; 141.532,66.809 ccw(c141.532,68.059) 142.772,68.222 ; 141.532,66.809 ccw(c141.532,68.059) 142.772,68.222 ; 141.826,12.399 ccw(c141.522,13.611) 142.772,13.611 ; 141.826,12.399 ccw(c141.522,13.611) 142.772,13.611 ; 142.772,13.611 142.772,26.5 ; 142.772,57.3 142.772,62.909 ; 142.772,68.222 142.772,85.125 ; 147.782,13.611 ccw(c149.032,13.611) 148.728,12.399 ; 147.782,13.611 ccw(c149.032,13.611) 148.728,12.399 ; 147.782,13.611 147.782,26.5 ; 147.782,26.5 cw(c149.032,26.5) 149.032,27.75 ; 147.782,26.5 cw(c149.032,26.5) 149.032,27.75 ; 147.782,57.3 ccw(c149.032,57.3) 149.032,56.05 ; 147.782,57.3 ccw(c149.032,57.3) 149.032,56.05 ; 147.782,57.3 147.782,63.06 ; 147.782,63.06 cw(c149.032,63.071) 147.785,63.153 ; 147.782,63.06 cw(c149.032,63.071) 147.785,63.153 ; 147.782,68.071 ccw(c149.032,68.06) 147.785,67.978 ; 147.782,68.071 ccw(c149.032,68.06) 147.785,67.978 ; 147.782,68.071 147.782,85.125 ; 147.782,85.125 cw(c149.032,85.125) 149.032,86.375 ; 147.782,85.125 cw(c149.032,85.125) 149.032,86.375 ; 147.782,100.525 ccw(c149.032,100.525) 149.032,99.275 ; 147.782,100.525 ccw(c149.032,100.525) 149.032,99.275 ; 147.782,100.525 147.782,102.125 cw(c153.532,102.125) 149.836,106.53 155.197,111.028 ; 147.785,63.154 ccw(c149.032,63.072) 147.785,63.153 ; 147.785,63.154 cw(c149.032,63.072) 147.785,63.154 ; 147.785,63.154 ccw(c149.032,63.071) 147.785,63.153 ; 147.785,63.154 cw(c149.032,63.071) 147.785,63.154 ; 147.785,63.153 147.785,63.154 ; 147.785,63.154 cw(c149.032,63.072) 149.146,64.317 ; 147.785,63.154 cw(c149.032,63.072) 149.146,64.317 ; 147.785,67.977 ccw(c149.032,68.059) 149.032,66.809 ; 147.785,67.977 ccw(c149.032,68.059) 149.032,66.809 ; 147.785,67.978 ccw(c149.032,68.059) 147.785,67.977 ; 147.785,67.978 ccw(c149.032,68.059) 147.785,67.978 ; 147.785,67.978 ccw(c149.032,68.06) 147.785,67.977 ; 147.785,67.978 ccw(c149.032,68.06) 147.785,67.978 ; 147.785,67.978 147.785,67.977 ; 148.728,12.399 ccw(c158.032,49.5) 158.032,11.25 165.632,11.25 ; 149.032,27.75 156.282,27.75 156.282,46.37 152.832,46.37 ; 149.032,56.05 156.282,56.05 156.282,55.07 152.832,55.07 ; 149.032,66.809 ccw(c149.032,68.059) 149.146,66.815 ; 149.032,66.809 ccw(c149.032,68.059) 149.146,66.815 ; 149.032,86.375 150.282,86.375 150.282,89.625 cw(c154.032,89.625) 150.403,90.57 cw(c154.032,89.625) 154.032,93.375 159.857,93.375 159.857,97.383 ; 149.032,99.275 187.032,99.275 ; 149.146,64.317 ccw(c149.2,65.566) 149.2,64.316 ccw(c149.2,65.566) 149.146,66.815 ; 151.582,47.62 ccw(c152.832,47.62) 152.832,46.37 ; 151.582,47.62 ccw(c152.832,47.62) 152.832,46.37 ; 151.582,47.62 151.582,53.82 ; 151.582,53.82 cw(c152.832,53.82) 152.832,55.07 ; 151.582,53.82 cw(c152.832,53.82) 152.832,55.07 ; 155.197,111.028 cw(c156.003,110.072) 155.199,111.03 ; 155.197,111.028 cw(c156.003,110.072) 155.199,111.03 ; 155.197,111.028 155.199,111.03 ; 155.199,111.03 cw(c158.895,106.625) 158.895,112.375 ; 158.895,112.375 cw(c158.895,111.125) 158.898,112.375 ; 158.895,112.375 cw(c158.895,111.125) 158.898,112.375 ; 158.895,112.375 158.898,112.375 ; 158.898,112.375 159.782,112.375 159.782,113.025 ; 159.782,113.025 cw(c161.032,113.025) 161.032,114.275 ; 159.782,113.025 cw(c161.032,113.025) 161.032,114.275 ; 159.857,97.383 cw(c161.102,97.495) 160.779,98.702 ; 159.857,97.383 cw(c161.102,97.495) 160.779,98.702 ; 160.779,98.702 cw(c168.032,71.568) 163.323,99.257 cw(c163.532,98.025) 163.532,99.275 172.532,99.275 cw(c172.532,98.025) 172.742,99.257 cw(c168.032,71.568) 175.285,98.702 ; 161.032,114.275 165.032,114.275 ; 165.032,114.275 cw(c165.032,113.025) 165.916,113.909 ; 165.032,114.275 cw(c165.032,113.025) 165.916,113.909 ; 165.632,11.25 ccw(c165.632,12.5) 166.882,12.5 ; 165.632,11.25 ccw(c165.632,12.5) 166.882,12.5 ; 165.916,113.909 166.416,113.409 ; 166.416,113.409 cw(c165.532,112.525) 166.782,112.525 ; 166.416,113.409 cw(c165.532,112.525) 166.782,112.525 ; 166.782,112.525 166.782,109.795 169.282,109.795 169.282,112.525 ; 166.882,12.5 166.882,18.351 ; 166.882,18.351 ccw(c165.632,18.351) 166.882,18.357 cw(c168.032,18.363) 166.882,18.359 ; 166.882,18.351 ccw(c165.632,18.351) 166.882,18.359 ; 166.882,18.359 cw(c168.032,18.363) 169.182,18.363 169.182,12.5 ; 169.182,12.5 ccw(c170.432,12.5) 170.432,11.25 ; 169.182,12.5 ccw(c170.432,12.5) 170.432,11.25 ; 169.282,112.525 cw(c170.532,112.525) 169.649,113.41 ; 169.282,112.525 cw(c170.532,112.525) 169.648,113.409 169.649,113.41 ; 169.649,113.41 170.147,113.908 ; 170.147,113.908 cw(c171.032,113.025) 171.032,114.275 ; 170.147,113.908 170.148,113.909 cw(c171.032,113.025) 171.032,114.275 ; 170.432,11.25 178.032,11.25 ccw(c178.032,49.5) 187.336,12.399 ; 171.032,114.275 175.032,114.275 ; 175.032,114.275 cw(c175.032,113.025) 176.282,113.025 ; 175.032,114.275 cw(c175.032,113.025) 176.282,113.025 ; 175.285,98.702 cw(c174.962,97.495) 176.207,97.383 ; 175.285,98.702 cw(c174.962,97.495) 176.207,97.383 ; 176.207,97.383 176.207,93.375 182.032,93.375 cw(c182.032,89.625) 185.592,90.804 cw(c182.032,89.625) 185.782,89.625 ; 176.282,113.025 176.282,112.375 177.169,112.375 cw(c177.169,106.625) 180.865,111.03 186.228,106.53 cw(c182.532,102.125) 188.282,102.125 188.282,100.525 ; 183.232,46.37 ccw(c183.232,47.62) 184.482,47.62 ; 183.232,46.37 ccw(c183.232,47.62) 184.482,47.62 ; 183.232,46.37 179.782,46.37 179.782,27.75 187.032,27.75 ; 183.232,55.07 cw(c183.232,53.82) 184.482,53.82 ; 183.232,55.07 cw(c183.232,53.82) 184.482,53.82 ; 183.232,55.07 179.782,55.07 179.782,56.05 187.032,56.05 ; 184.482,47.62 184.482,53.82 ; 185.782,89.622 ccw(c184.532,89.625) 185.782,89.625 ; 185.782,89.622 ccw(c184.532,89.625) 185.782,89.625 ; 185.782,89.622 185.782,86.375 187.032,86.375 ; 185.782,89.622 185.782,89.625 ; 186.918,64.317 cw(c187.032,63.072) 187.032,64.322 ; 186.918,64.317 cw(c187.032,63.072) 187.032,64.322 ; 186.918,64.317 cw(c186.865,65.566) 186.865,64.316 cw(c186.865,65.566) 186.918,66.815 ; 186.918,66.815 ccw(c187.032,68.059) 187.032,66.809 ; 186.918,66.815 ccw(c187.032,68.059) 187.032,66.809 ; 187.032,27.75 cw(c187.032,26.5) 188.282,26.5 ; 187.032,27.75 cw(c187.032,26.5) 188.282,26.5 ; 187.032,56.05 ccw(c187.032,57.3) 188.282,57.3 ; 187.032,56.05 ccw(c187.032,57.3) 188.282,57.3 ; 187.032,64.322 cw(c187.032,63.072) 187.038,64.322 cw(c187.043,63.072) 187.043,64.322 ; 187.032,64.322 187.043,64.322 ; 187.032,66.809 ccw(c187.032,68.059) 187.038,66.809 ccw(c187.043,68.059) 187.043,66.809 ; 187.032,66.809 187.043,66.809 ; 187.032,86.375 cw(c187.032,85.125) 188.282,85.125 ; 187.032,86.375 cw(c187.032,85.125) 188.282,85.125 ; 187.032,99.275 ccw(c187.032,100.525) 188.282,100.525 ; 187.032,99.275 ccw(c187.032,100.525) 188.282,100.525 ; 187.043,64.322 cw(c187.043,63.072) 188.282,62.909 ; 187.043,64.322 cw(c187.043,63.072) 188.282,62.909 ; 187.043,66.809 ccw(c187.043,68.059) 188.282,68.222 ; 187.043,66.809 ccw(c187.043,68.059) 188.282,68.222 ; 187.336,12.399 ccw(c187.032,13.611) 188.282,13.611 ; 187.336,12.399 ccw(c187.032,13.611) 188.282,13.611 ; 188.282,13.611 188.282,26.5 ; 188.282,57.3 188.282,62.909 ; 188.282,68.222 188.282,85.125

## Other copper
Multi-Layer:
  pour cut-out: 24.511,113.025 28.511,113.025 29.011,112.525 29.011,108.545 34.011,108.545 34.011,112.525 34.511,113.025 38.511,113.025 38.511,111.125 40.648,111.125 cw(c40.648,106.625) 43.54,110.072 48.903,105.572 cw(c46.011,102.125) 50.511,102.125 50.511,100.525 12.511,100.525 12.511,102.125 cw(c17.011,102.125) 14.118,105.572 19.481,110.072 cw(c22.374,106.625) 22.374,111.125 24.511,111.125
  pour cut-out: 17.5,92.125 ccw(c17.5,89.625) 15.081,90.255 ccw(c17.5,89.625) 15,89.625 15,85.125 12.5,85.125 12.5,68.059 12.5,68.06 cw(c12.667,65.566) 12.5,63.071 12.5,63.072 12.5,57.3 21,57.3 21,53.82 16.3,53.82 16.3,47.62 21,47.62 21,26.5 12.5,26.5 12.5,13.611 ccw(c21.5,49.5) 21.5,12.5 29.1,12.5 29.1,18.351 cw(c31.5,18.357) 33.9,18.363 33.9,12.5 41.5,12.5 ccw(c41.5,49.5) 50.5,13.611 50.5,26.5 42,26.5 42,47.62 46.7,47.62 46.7,53.82 42,53.82 42,57.3 50.5,57.3 50.5,63.072 50.5,63.071 cw(c50.333,65.566) 50.5,68.06 50.5,68.059 50.5,85.125 48,85.125 48,89.625 ccw(c45.5,89.625) 47.873,90.411 ccw(c45.5,89.625) 45.5,92.125 38.425,92.125 38.425,97.476 38.43,97.495 ccw(c31.5,71.568) 36,98.025 27,98.025 ccw(c31.5,71.568) 24.57,97.495 24.575,97.476 24.575,92.125
  pour cut-out: 70.011,113.025 74.011,113.025 74.511,112.525 74.511,108.545 79.511,108.545 79.511,112.525 80.011,113.025 84.011,113.025 84.011,111.125 86.148,111.125 cw(c86.148,106.625) 89.04,110.072 94.403,105.572 cw(c91.511,102.125) 96.011,102.125 96.011,100.525 58.011,100.525 58.011,102.125 cw(c62.511,102.125) 59.618,105.572 64.981,110.072 cw(c67.874,106.625) 67.874,111.125 70.011,111.125
  pour cut-out: 63.011,92.125 ccw(c63.011,89.625) 60.591,90.255 ccw(c63.011,89.625) 60.511,89.625 60.511,85.125 58.011,85.125 58.011,68.059 58.011,68.06 cw(c58.178,65.566) 58.011,63.071 58.011,63.072 58.011,57.3 66.511,57.3 66.511,53.82 61.811,53.82 61.811,47.62 66.511,47.62 66.511,26.5 58.011,26.5 58.011,13.611 ccw(c67.011,49.5) 67.011,12.5 74.611,12.5 74.611,18.351 cw(c77.011,18.357) 79.411,18.363 79.411,12.5 87.011,12.5 ccw(c87.011,49.5) 96.011,13.611 96.011,26.5 87.511,26.5 87.511,47.62 92.211,47.62 92.211,53.82 87.511,53.82 87.511,57.3 96.011,57.3 96.011,63.072 96.011,63.071 cw(c95.844,65.566) 96.011,68.06 96.011,68.059 96.011,85.125 93.511,85.125 93.511,89.625 ccw(c91.011,89.625) 93.384,90.411 ccw(c91.011,89.625) 91.011,92.125 83.936,92.125 83.936,97.476 83.941,97.495 ccw(c77.011,71.568) 81.511,98.025 72.511,98.025 ccw(c77.011,71.568) 70.081,97.495 70.086,97.476 70.086,92.125
  pour cut-out: 115.521,113.025 119.521,113.025 120.021,112.525 120.021,108.545 125.021,108.545 125.021,112.525 125.521,113.025 129.521,113.025 129.521,111.125 131.659,111.125 cw(c131.659,106.625) 134.551,110.072 139.914,105.572 cw(c137.021,102.125) 141.521,102.125 141.521,100.525 103.521,100.525 103.521,102.125 cw(c108.021,102.125) 105.129,105.572 110.492,110.072 cw(c113.384,106.625) 113.384,111.125 115.521,111.125
  pour cut-out: 108.522,92.125 ccw(c108.522,89.625) 106.102,90.255 ccw(c108.522,89.625) 106.022,89.625 106.022,85.125 103.522,85.125 103.522,68.059 103.521,68.06 cw(c103.689,65.566) 103.521,63.071 103.522,63.072 103.522,57.3 112.022,57.3 112.022,53.82 107.322,53.82 107.322,47.62 112.022,47.62 112.022,26.5 103.522,26.5 103.522,13.611 ccw(c112.522,49.5) 112.522,12.5 120.122,12.5 120.122,18.351 cw(c122.522,18.357) 124.922,18.363 124.922,12.5 132.522,12.5 ccw(c132.522,49.5) 141.522,13.611 141.522,26.5 133.022,26.5 133.022,47.62 137.722,47.62 137.722,53.82 133.022,53.82 133.022,57.3 141.522,57.3 141.522,63.072 141.522,63.071 cw(c141.354,65.566) 141.522,68.06 141.522,68.059 141.522,85.125 139.022,85.125 139.022,89.625 ccw(c136.522,89.625) 138.895,90.411 ccw(c136.522,89.625) 136.522,92.125 129.447,92.125 129.447,97.476 129.452,97.495 ccw(c122.522,71.568) 127.022,98.025 118.022,98.025 ccw(c122.522,71.568) 115.592,97.495 115.597,97.476 115.597,92.125
  pour cut-out: 161.032,113.025 165.032,113.025 165.532,112.525 165.532,108.545 170.532,108.545 170.532,112.525 171.032,113.025 175.032,113.025 175.032,111.125 177.169,111.125 cw(c177.169,106.625) 180.062,110.072 185.425,105.572 cw(c182.532,102.125) 187.032,102.125 187.032,100.525 149.032,100.525 149.032,102.125 cw(c153.532,102.125) 150.64,105.572 156.003,110.072 cw(c158.895,106.625) 158.895,111.125 161.032,111.125
  pour cut-out: 154.032,92.125 ccw(c154.032,89.625) 151.613,90.255 ccw(c154.032,89.625) 151.532,89.625 151.532,85.125 149.032,85.125 149.032,68.059 149.032,68.06 cw(c149.2,65.566) 149.032,63.071 149.032,63.072 149.032,57.3 157.532,57.3 157.532,53.82 152.832,53.82 152.832,47.62 157.532,47.62 157.532,26.5 149.032,26.5 149.032,13.611 ccw(c158.032,49.5) 158.032,12.5 165.632,12.5 165.632,18.351 cw(c168.032,18.357) 170.432,18.363 170.432,12.5 178.032,12.5 ccw(c178.032,49.5) 187.032,13.611 187.032,26.5 178.532,26.5 178.532,47.62 183.232,47.62 183.232,53.82 178.532,53.82 178.532,57.3 187.032,57.3 187.032,63.072 187.032,63.071 cw(c186.865,65.566) 187.032,68.06 187.032,68.059 187.032,85.125 184.532,85.125 184.532,89.625 ccw(c182.032,89.625) 184.405,90.411 ccw(c182.032,89.625) 182.032,92.125 174.957,92.125 174.957,97.476 174.962,97.495 ccw(c168.032,71.568) 172.532,98.025 163.532,98.025 ccw(c168.032,71.568) 161.102,97.495 161.107,97.476 161.107,92.125

## Silkscreen, mask and mechanical layers (free items; w line width, h text height)
Route Tool Path:
  drawing of 668 lines, arcs and shapes, not listed
Mechanical 7:
  drawing of 1364 lines, arcs and shapes, not listed

## Panel: embedded boards
"MIN_MOW_Moway_V3 PCB.PcbDoc" at 12.5,98.025, 4 rows x 1 columns, spacing 45.511 x 88.025, rotation 270
"..\..\IR\V3\MIN_MOW_03 IR_V3 PCB.PcbDoc" at 12.5,113.025, 4 rows x 1 columns, spacing 45.5 x 15, rotation 270

## Text inside footprints (layer, text, board x,y; h text height)
Designator28: Top Overlay "RoHS" at 166.55,3.7 h1.52; Top Overlay "P" at 166.975,4.125 h4
Designator28_1: Top Overlay "RoHS" at 32.993,121.825 h1.52 r180; Top Overlay "P" at 32.568,121.4 h4 r180
Designator30: Top Overlay "S/N:" at 113.775,7.7 h0.8
Designator30_1: Top Overlay "S/N:" at 85.768,117.825 h0.8 r180
Designator31: Top Overlay "ESD" at 30.201,1.905 h0.8
Designator31_1: Top Overlay "ESD" at 169.342,123.62 h0.8 r180